# Altium PCB AnalogDimmer.PcbDoc
Units mm, origin at the board's own origin, x right, y up, seen from the top; angles counter-clockwise.
Board outline 40 x 40 mm, 2 copper layers (Top Layer, Bottom Layer), stack 1.535 mm thick; 14 components, 8 nets, 26 pads, 8 vias.
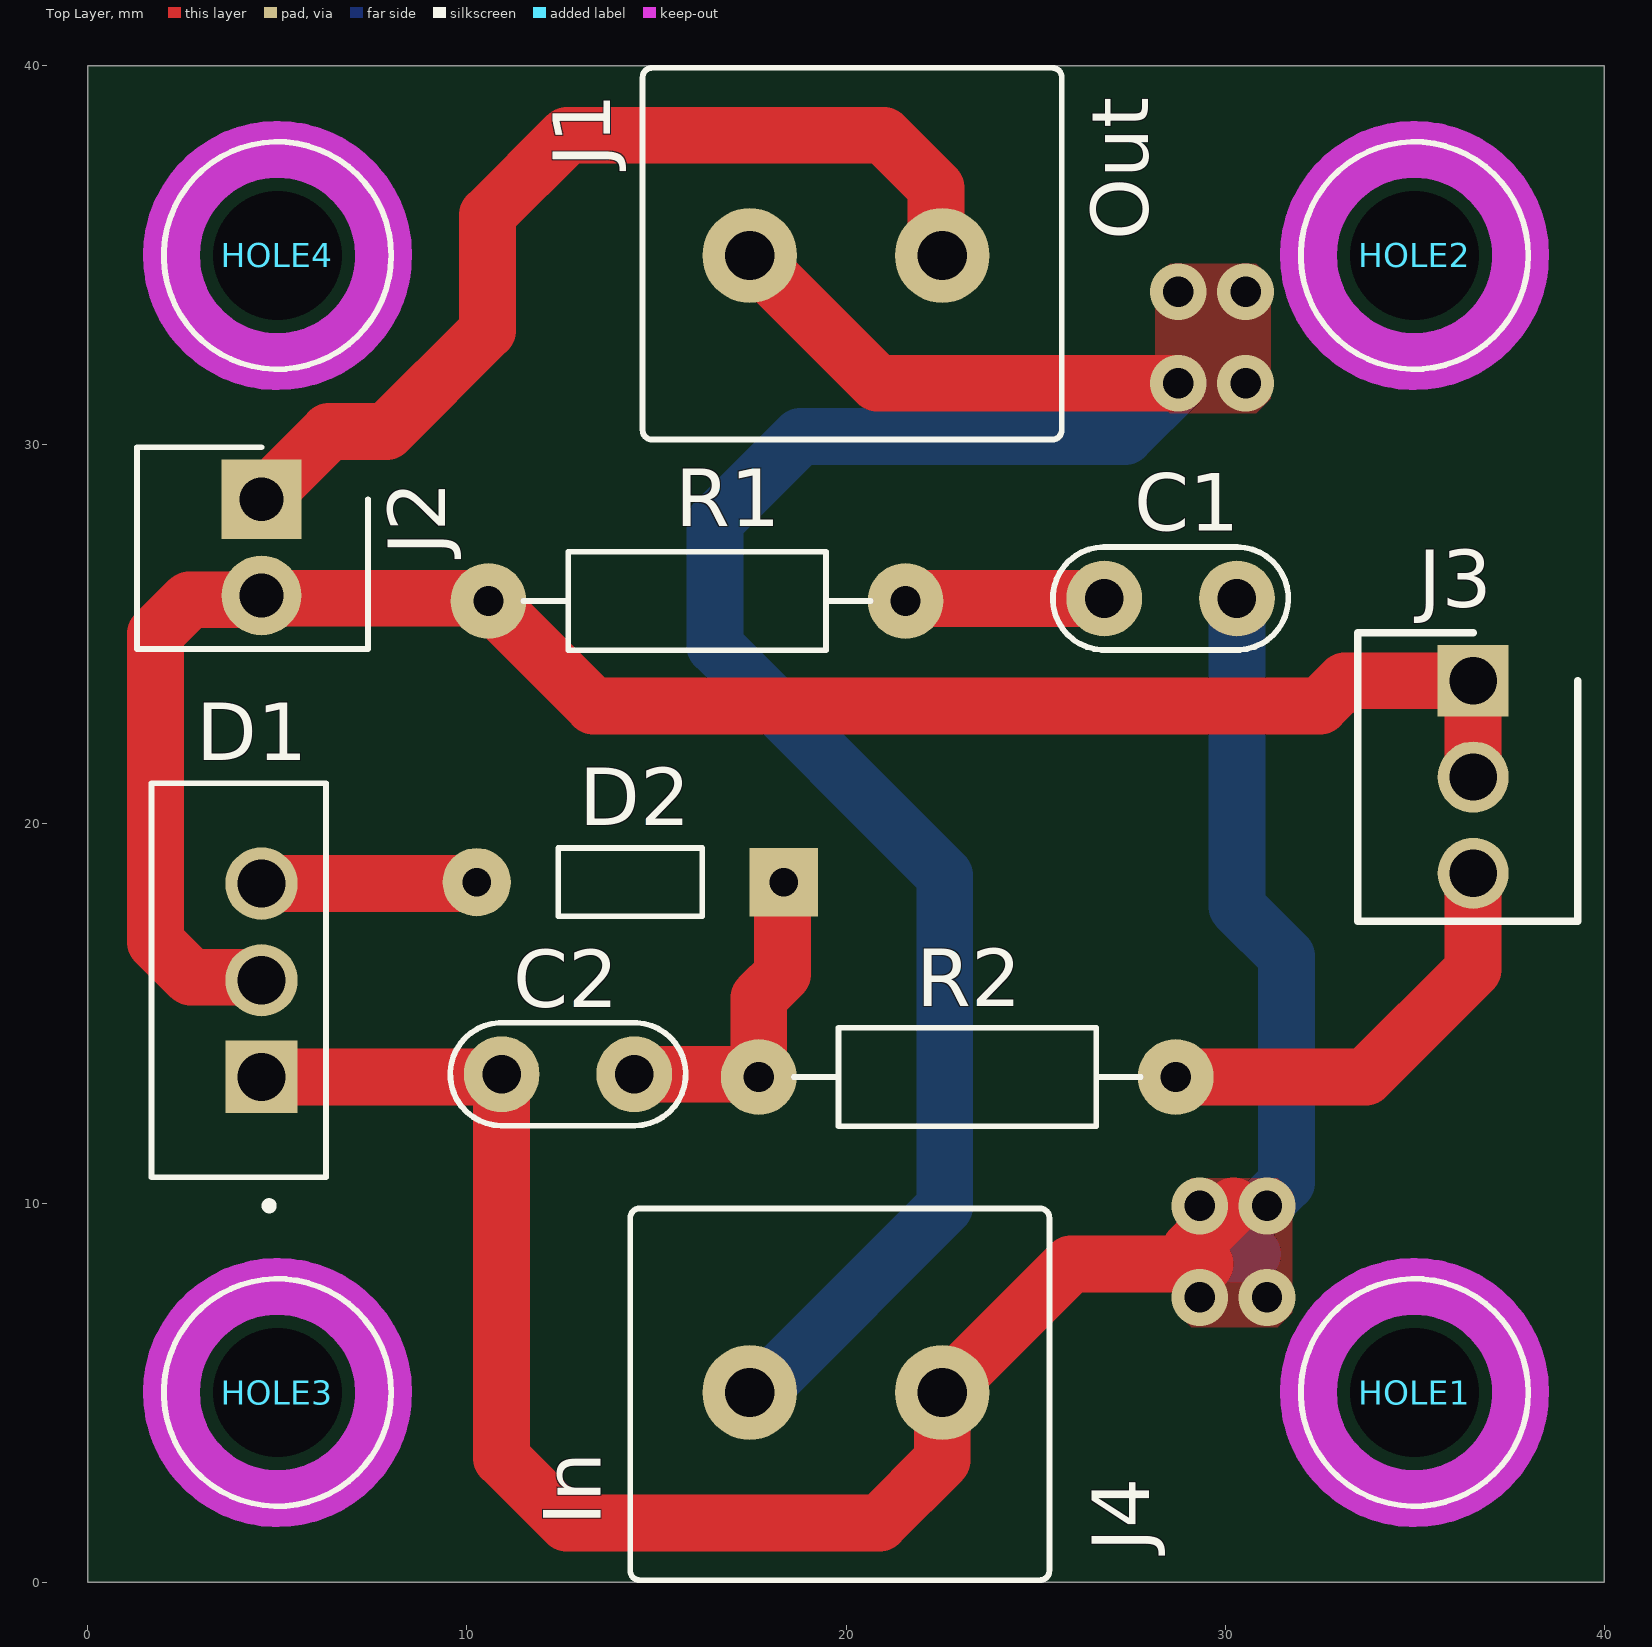
[diagram p0: Top Layer view]
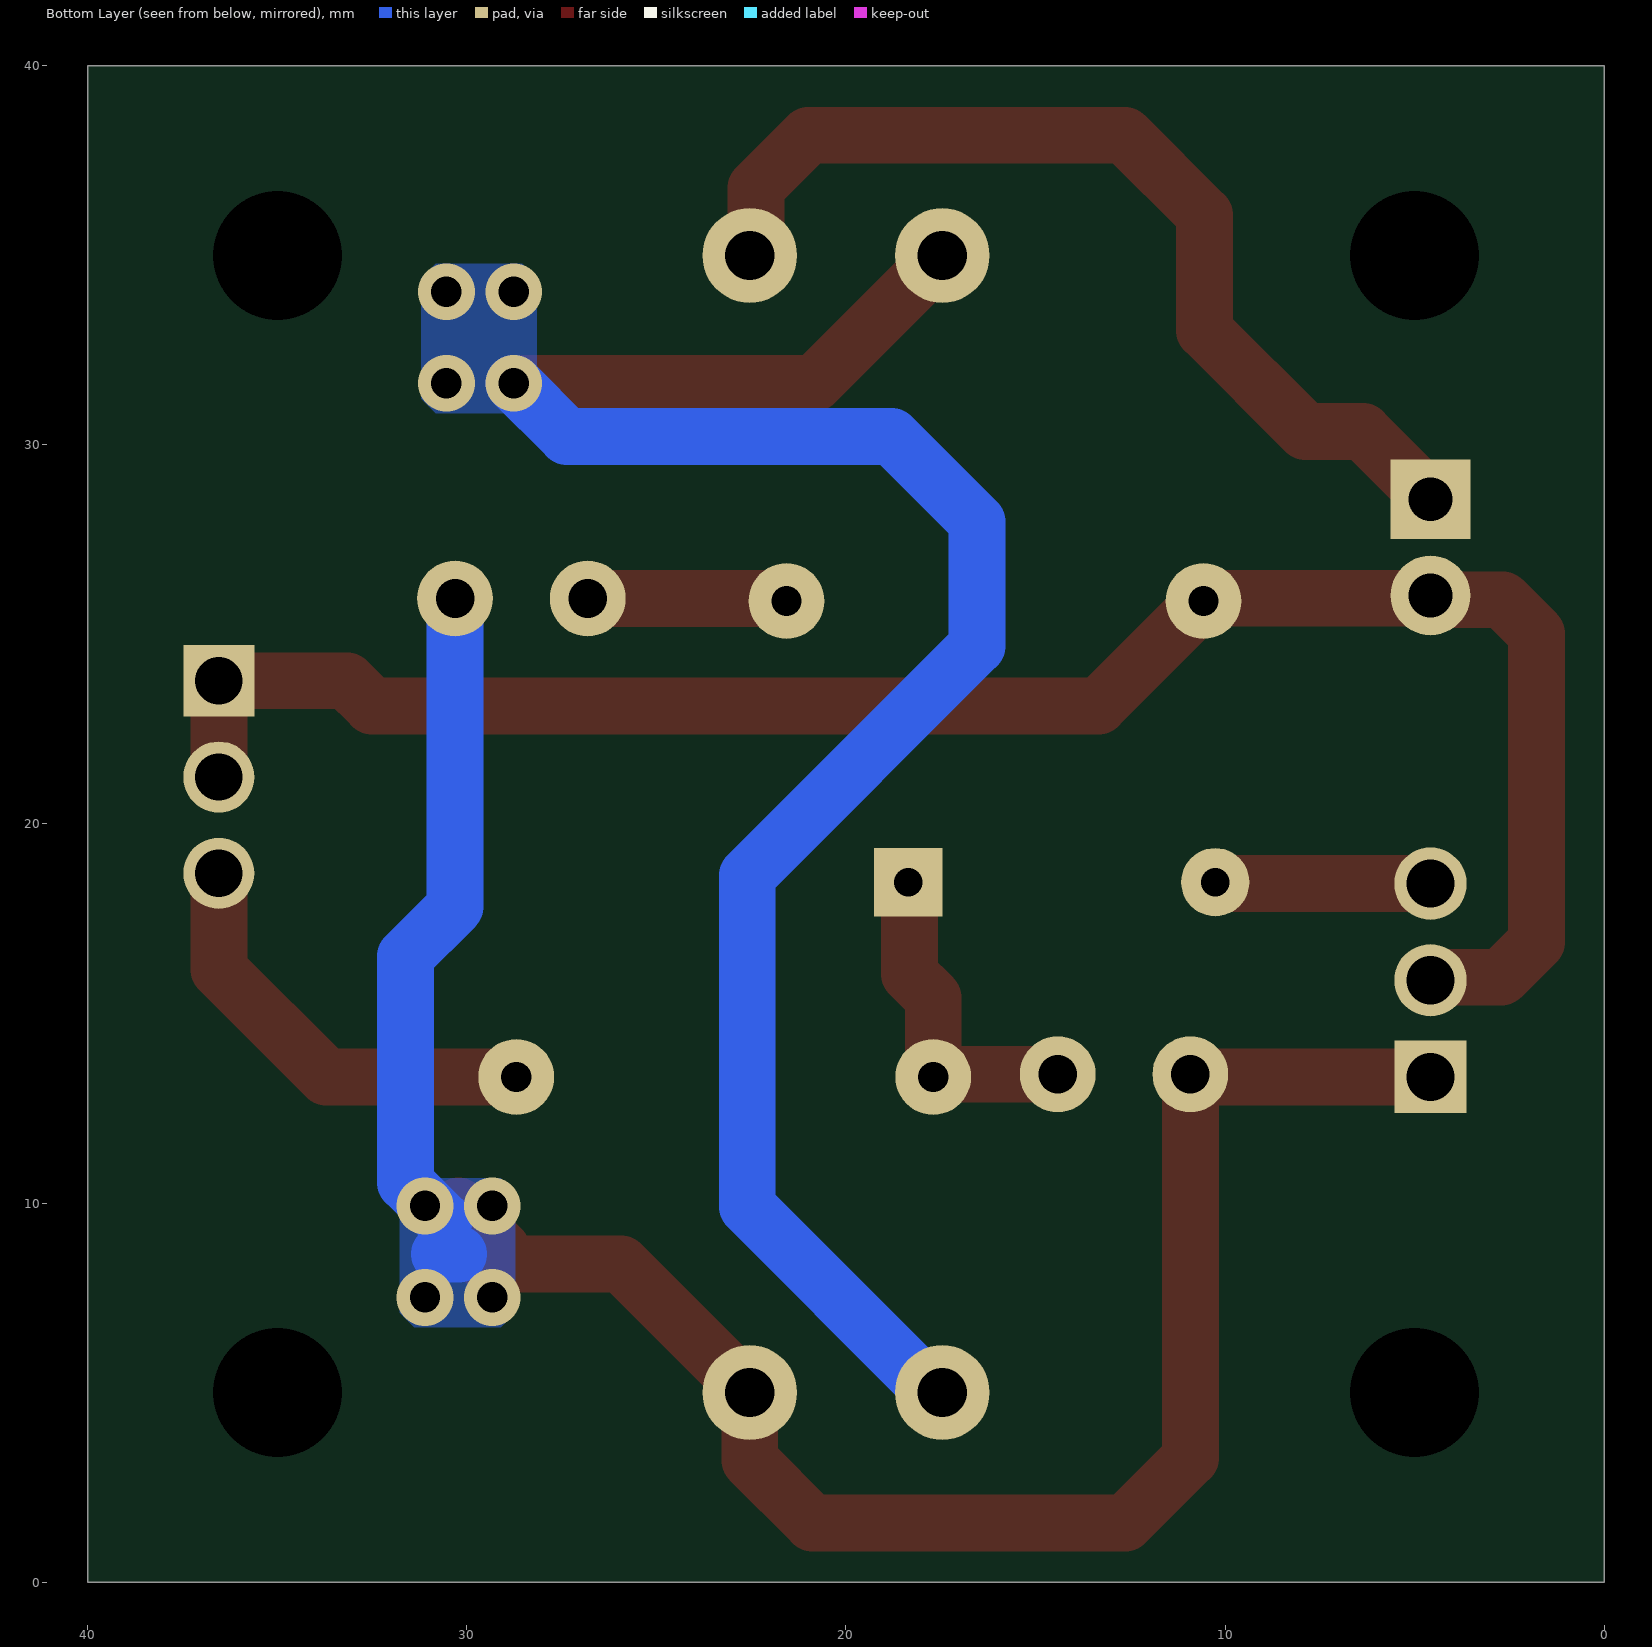
[diagram p1: Bottom Layer view, seen from below]
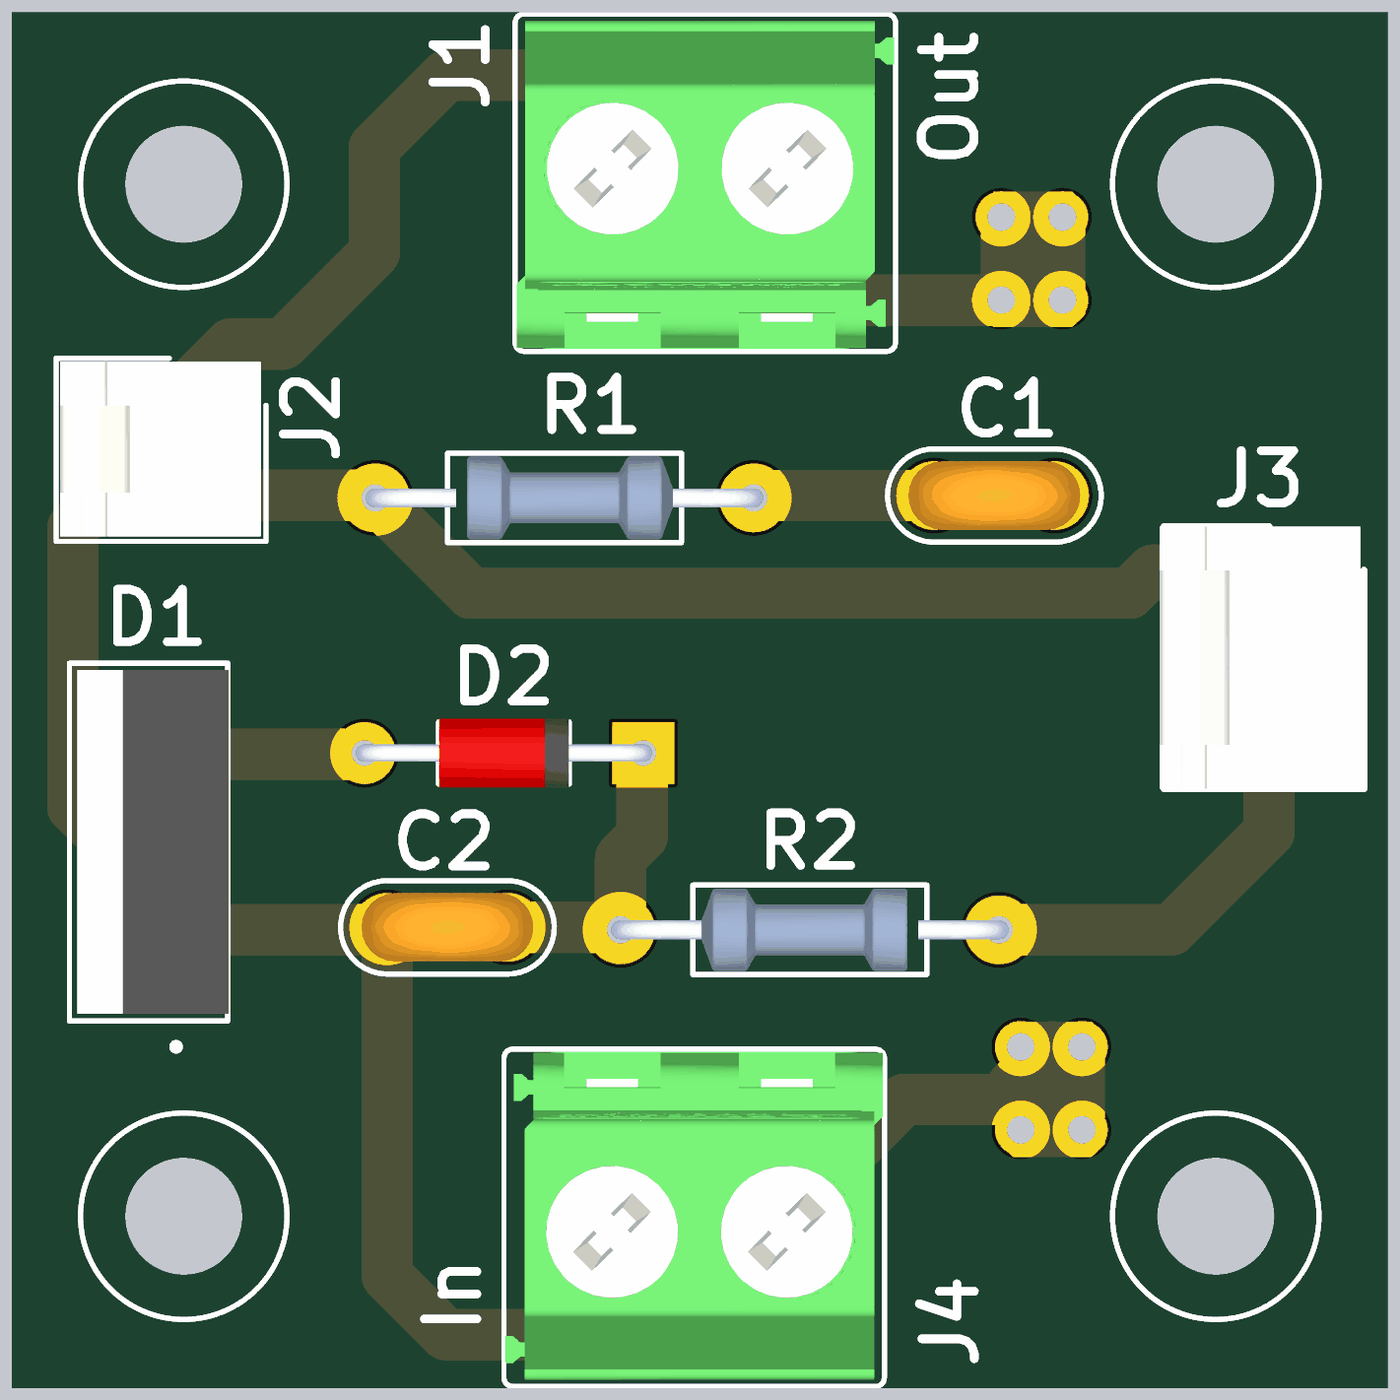
[diagram p2: 3D render of the assembled board from above, using the file's embedded part models]

## Layer stack, top to bottom
Top Solder: solder mask 0.0325, Solder Resist, Dk 3.8
Top Layer: signal copper 0.035
Dielectric 1: dielectric 1.465, FR-4, Dk 4.5
Bottom Layer: signal copper 0.035
Bottom Solder: solder mask 0.0325, Solder Resist, Dk 3.8

## Board outline
0,0 0,40 40,40 40,0

## Design rules (kind name [scope] priority, off if disabled: settings)
Clearance [All] p1: gap=0.254 ignorepadtopadclearanceinfootprint=FALSE
PolygonConnect [All] p1: thpad.connectstyle=Relief thpad.reliefconductorwidth=0.254 thpad.reliefentries=4 thpad.polygonreliefangle="90 Angle" thpad.airgapwidth=0.254 smdpad.connectstyle=Direct smdpad.reliefconductorwidth=0.254 smdpad.reliefentries=4 smdpad.polygonreliefangle="90 Angle" smdpad.airgapwidth=0.254 via.connectstyle=Direct via.reliefconductorwidth=0.254 via.reliefentries=4 via.polygonreliefangle="90 Angle" via.airgapwidth=0.254
RoutingVias [All] p1: holewidth=0.711 width=1.27 viastyle="Through Hole" minholewidth=0.711 minwidth=1.27 maxholewidth=0.711 maxwidth=1.27
SolderMaskExpansion [All] p1: expansion=0.102 istentingtop=FALSE
Width [All] p1: maxlimit=20 minlimit=1.5 preferedwidth=1.5
30 further rules are at their usual default settings.

## Classes and differential pairs
component class Schematic: C1 C2 D1 D2 HOLE1 HOLE2 HOLE3 J1 J2 J3 J4 R1 R2

## Components (designator, comment, footprint, x,y, rotation, side; value= is the part's Value field where it differs from the comment)
C1 "CAPACITOR_N_POL_47nF" CERAMIC_CAPACITOR_GENERIC_PTH 28.564,25.95 r0 top value="47 nF"
C2 "CAPACITOR_N_POL_220nF" CERAMIC_CAPACITOR_GENERIC_PTH 12.665,13.398 r180 top value="220 nF"
D1 "TRIAC_TIC226D" TO-220 4.578,13.327 r90 top
D2 "DIAC_DB3" DO-35 14.307,18.465 r180 top
HOLE1 "FURO_M3" FURO_M3 35,5 r0 top
HOLE2 "FURO_M3" FURO_M3 35,35 r0 top locked
HOLE3 "FURO_M3" FURO_M3 5,5 r0 top locked
HOLE4 "FURO_M3" FURO_M3 5,35 r0 top locked
J1 "BORNE_2P_1888687" 1888687 20,35 r180 top
J2 "CONECTOR_2P_640456-2" 640456-2 4.578,28.57 r90 top
J3 "CONECTOR_3P_640456-3" 640456-3 36.546,21.239 r270 top
J4 "BORNE_2P_1888687" 1888687 20,5 r0 top locked
R1 "RESISTOR_330OHMS" RESISTOR_1-4_PTH 16.069,25.882 r180 top value="330 Ohms"
R2 "RESISTOR_10KOHMS" RESISTOR_1-4_PTH 23.2,13.327 r0 top value="10 kOhms"

## Footprints (in the part's own frame and the unit in brackets; to place one, negate y for a bottom-side part, rotate by r counter-clockwise, add the part's x,y. Pads: shape width x height; smd on the part's side, far side on the other; paste and mask are expansions set on the pad)
640456-2 [mm]
  rect 2.1x2.1 hole 1.15: 1(0,0)
  round 2.1 hole 1.15: 2(-2.54,0)
  silkscreen extent -3.95,-2.81 1.37,3.29, body extent -3.81,-2.67 1.27,3.17, height 10.05
640456-3 [mm]
  rect 1.875x1.875 hole 1.25: 1(-2.54,0)
  round 1.875 hole 1.25: 2(0,0) 3(2.54,0)
  silkscreen extent -3.81,-3.05 3.81,2.76, body extent -3.81,-3.18 3.81,2.67, height 10.07
1888687 [mm]
  round 2.5 hole 1.3: 1(-2.54,0) 2(2.54,0)
  silkscreen extent -5.69,-4.95 5.37,4.86, body extent -5.65,-4.75 5.33,4.78, height 15.01
CERAMIC_CAPACITOR_GENERIC_PTH [mm]
  round 2 hole 1.02: 1(-1.75,0) 2(1.75,0)
  silkscreen extent -3.11,-1.36 3.11,1.36, body extent -2.47,-1 2.47,1, height 6.49
DO-35 [mm]
  rect 1.8x1.8 hole 0.75: 1(-4.05,0)
  round 1.8 hole 0.75: 2(4.05,0)
  silkscreen extent -1.9,-0.9 1.9,0.9, body extent -4.3,-0.99 4.3,0.99, height 2.05
FURO_M3 [mm]
  round 0 hole 3.4 unplated mask+0.1: 4(0,0)
  Top Layer keep-out lines w1.5: 2.64,-0.932 cw(c0,0) 2.679,-0.815
  silkscreen extent -3,-3 3,3
RESISTOR_1-4_PTH [mm]
  round 2 hole 0.8: 1(-5.5,0) 2(5.5,0)
  silkscreen extent -4.58,-1.3 4.58,1.3, body extent -5.78,-1.2 5.77,1.2, height 2.52
TO-220 [mm]
  rect 1.91x1.91 hole 1.27: 1(0,0)
  round 1.91 hole 1.27: 2(2.55,0) 3(5.1,0)
  silkscreen extent -3.5,-1.7 7.75,2.9, body extent -2.44,-1.73 7.56,2.68, height 19.3

## Part data
D1: PartNumber=TIC226D
D2: PartNumber=DB3
J1 J4: PartNumber=1888687
J2: PartNumber=640456-2
J3: PartNumber=640456-3

## Via types
v1: diameter 1.5, hole 0.8, Top Layer to Bottom Layer, 8 vias

## Nets (pads, with @x,y where several pads share a name; then routed paths per layer and width w, separated by ;. In a path a pad name is that pad's centre, name@x,y a point inside that pad or via, vN(x,y) a via of type N, cw(c..) or ccw(c..) an arc to the next point about the centre after c; other vN are vias at no path point)
NetC1_1: C1.1 R1.1 | length 5.3
  Top Layer w1.5: R1.1 21.637,25.95 C1.1
NetC1_2: C1.2 C2.2 D1.1 J4.2 | length 59.4
  Top Layer w1.5: D1.1 10.844,13.327 C2.2 10.915,3.273 12.632,1.556 20.883,1.556 22.54,3.213 J4.2 25.935,8.395 29.477,8.395 ; 29.332,8.654 29.26,8.654 29.12,8.793 29.091,8.793 30.221,9.924
  Bottom Layer w1.5: 30.221,8.654 30.729,8.654 ; C1.2 30.314,17.819 31.623,16.51 31.623,10.541 v1@30.607,9.525
  other v1: 29.332,7.511 31.11,7.511 29.332,9.924 31.11,9.924
NetC2_1: C2.1 D2.1 R2.1 | length 8.7
  Top Layer w1.5: C2.1 17.629,13.398 R2.1 17.7,15.414 18.324,16.038 D2.1@18.324,18.431
NetD1_2: D1.2 J2.2 J3.1 J3.2 R1.2 | length 50.6
  Top Layer w1.5: D1.2 4.5,15.955 2.714,15.955 1.778,16.891 1.778,25.019 2.674,25.915 4.463,25.915 J2.2 4.652,25.956 10.495,25.956 R1.2 13.337,23.114 32.504,23.114 33.169,23.779 J3.1 J3.2
NetD1_3: D1.3 D2.2 | length 5.7
  Top Layer w1.5: D1.3 10.219,18.427 D2.2
NetJ1_1: J1.1 J2.1 | length 26
  Top Layer w1.5: J2.1 6.361,30.353 7.874,30.353 10.541,33.02 10.541,36.068 12.646,38.173 20.988,38.173 22.376,36.785 22.376,35.164 J1.1
NetJ1_2: J1.2 J4.1 | length 54.2
  Top Layer w1.5: J1.2 20.829,31.631 v1(28.766,31.631)
  Bottom Layer w1.5: J4.1 17.622,5 17.922,5.3 18,5.3 22.606,9.906 22.606,18.638 16.543,24.701 16.543,27.973 18.796,30.226 27.361,30.226 v1(28.766,31.631)
  other v1: 30.544,31.631 28.766,34.044 30.544,34.044
NetJ3_3: J3.3 R2.2 | length 11.6
  Top Layer w1.5: R2.2 33.714,13.327 36.546,16.159 J3.3
pads on no net: HOLE1.4 HOLE2.4 HOLE3.4 HOLE4.4

## Polygon pours and split planes (outlines as drawn)
NetC1_2 on Top Layer "NONET_L-01_P-001" (solid, pour order 2): 28.729,10.278 29.11,10.659 31.396,10.659 31.777,10.278 31.777,7.103 31.396,6.722 29.11,6.722 28.729,7.103
NetJ1_2 on Top Layer "NONET_L-01_P-001" (solid, pour order 0): 28.163,34.398 28.544,34.779 30.83,34.779 31.211,34.398 31.211,31.223 30.83,30.842 28.544,30.842 28.163,31.223
NetC1_2 on Bottom Layer "NONET_L-01_P-001" (solid, pour order 3): 28.729,10.278 29.11,10.659 31.396,10.659 31.777,10.278 31.777,7.103 31.396,6.722 29.11,6.722 28.729,7.103
NetJ1_2 on Bottom Layer "NONET_L-01_P-001" (solid, pour order 1): 28.163,34.398 28.544,34.779 30.83,34.779 31.211,34.398 31.211,31.223 30.83,30.842 28.544,30.842 28.163,31.223

## Silkscreen, mask and mechanical layers (free items; w line width, h text height)
Top Overlay:
  text "Out" at 27.978,35.406 h1.52 r90
  text "In" at 13.532,1.485 h1.52 r90
Drill Guide:
  circle w0.254: c22.54,5 r0.517
BoardShape:
  the board outline again, w0.254